# Altium PCB Simple_Foc_Power.pcbdoc
Units mil, origin at the board's own origin, x right, y up, seen from the top; angles counter-clockwise.
Board outline 2915 x 3100 mil, 2 copper layers (Top Layer, Bottom Layer); 82 components, 90 nets, 266 pads, 99 vias.
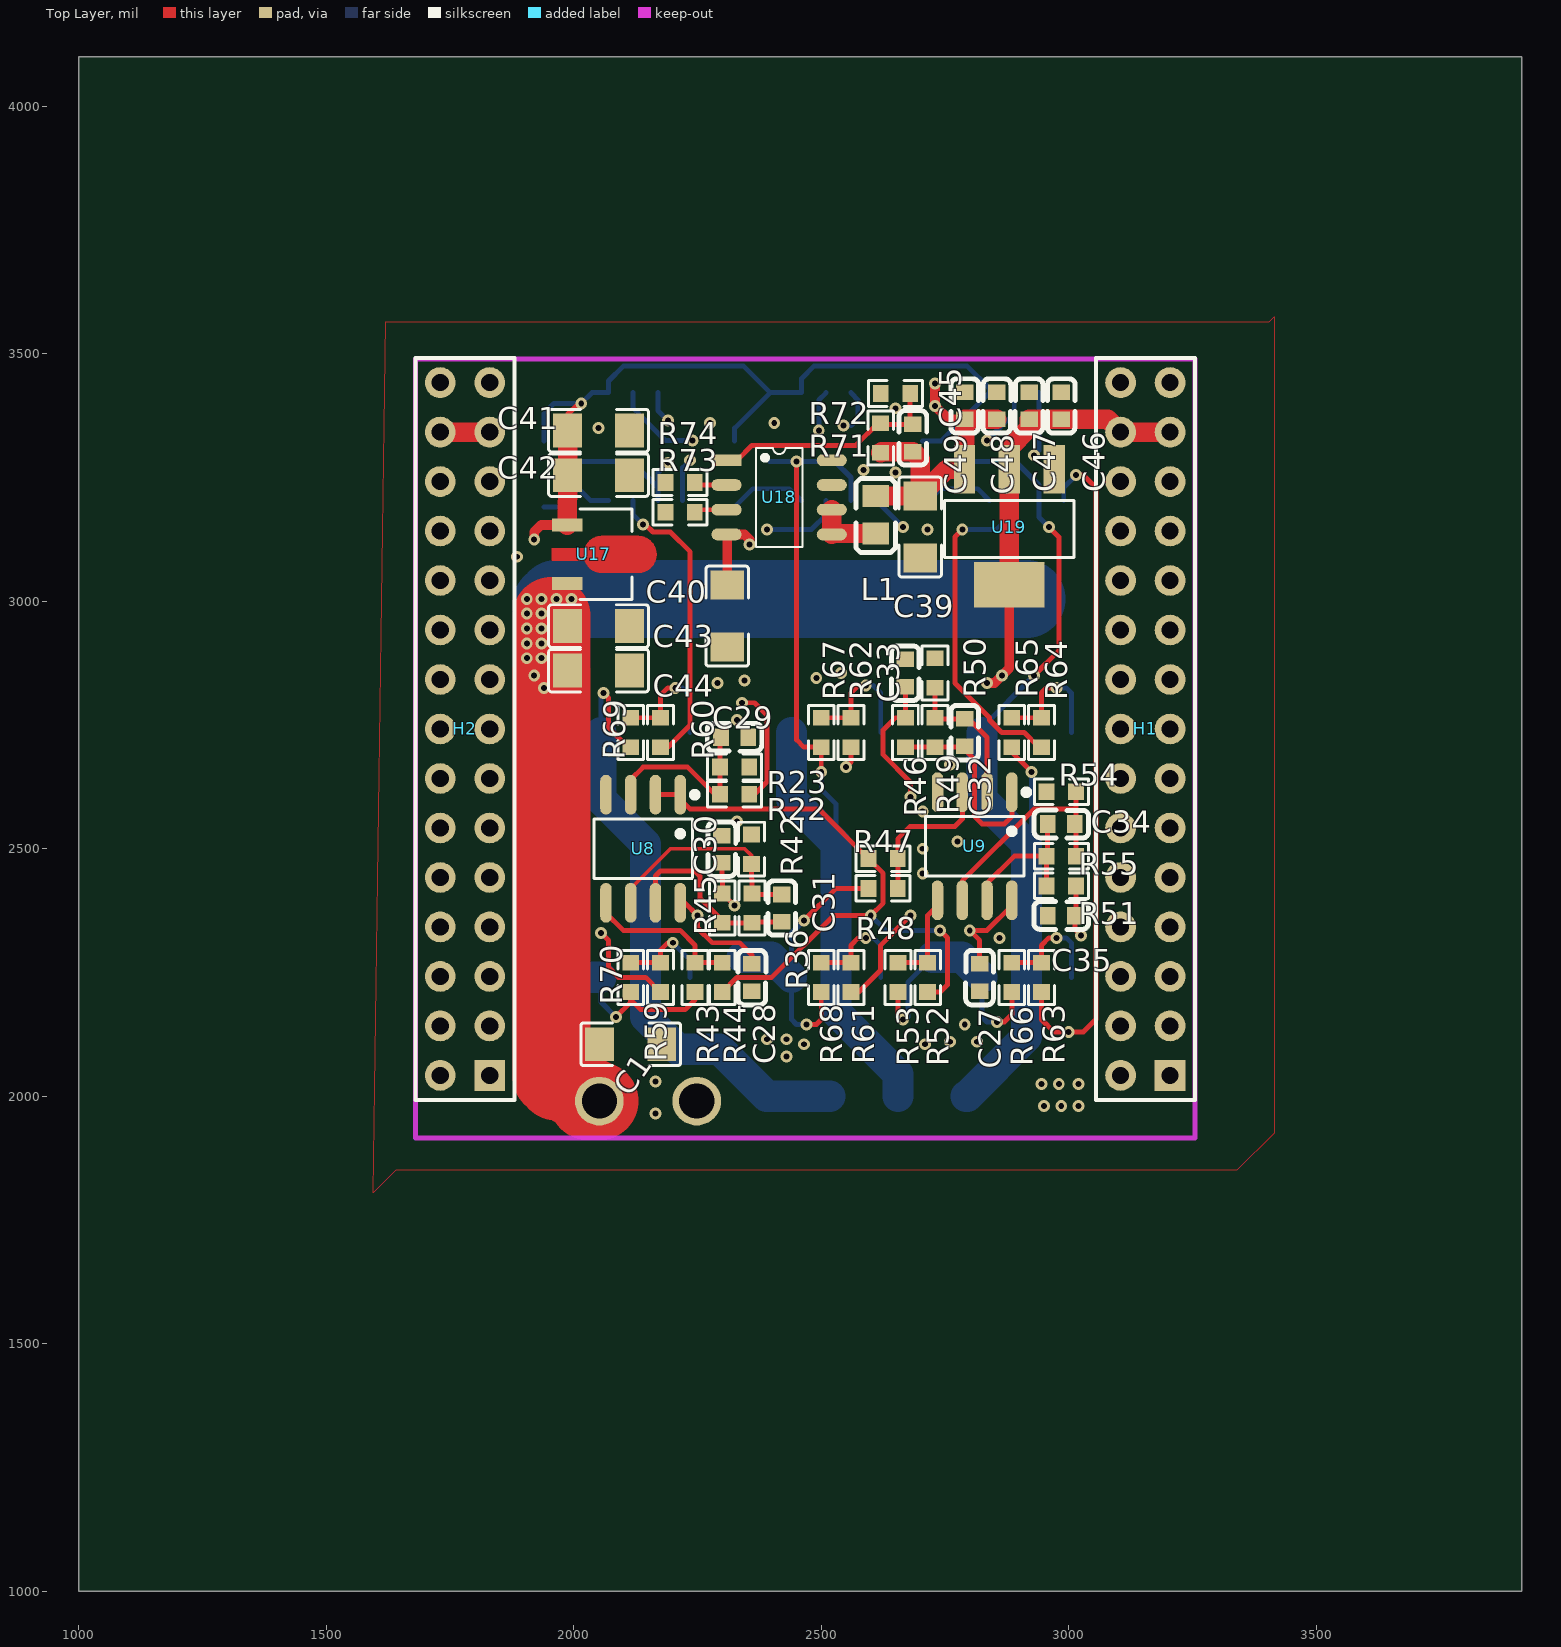
[diagram p0: Top Layer view]
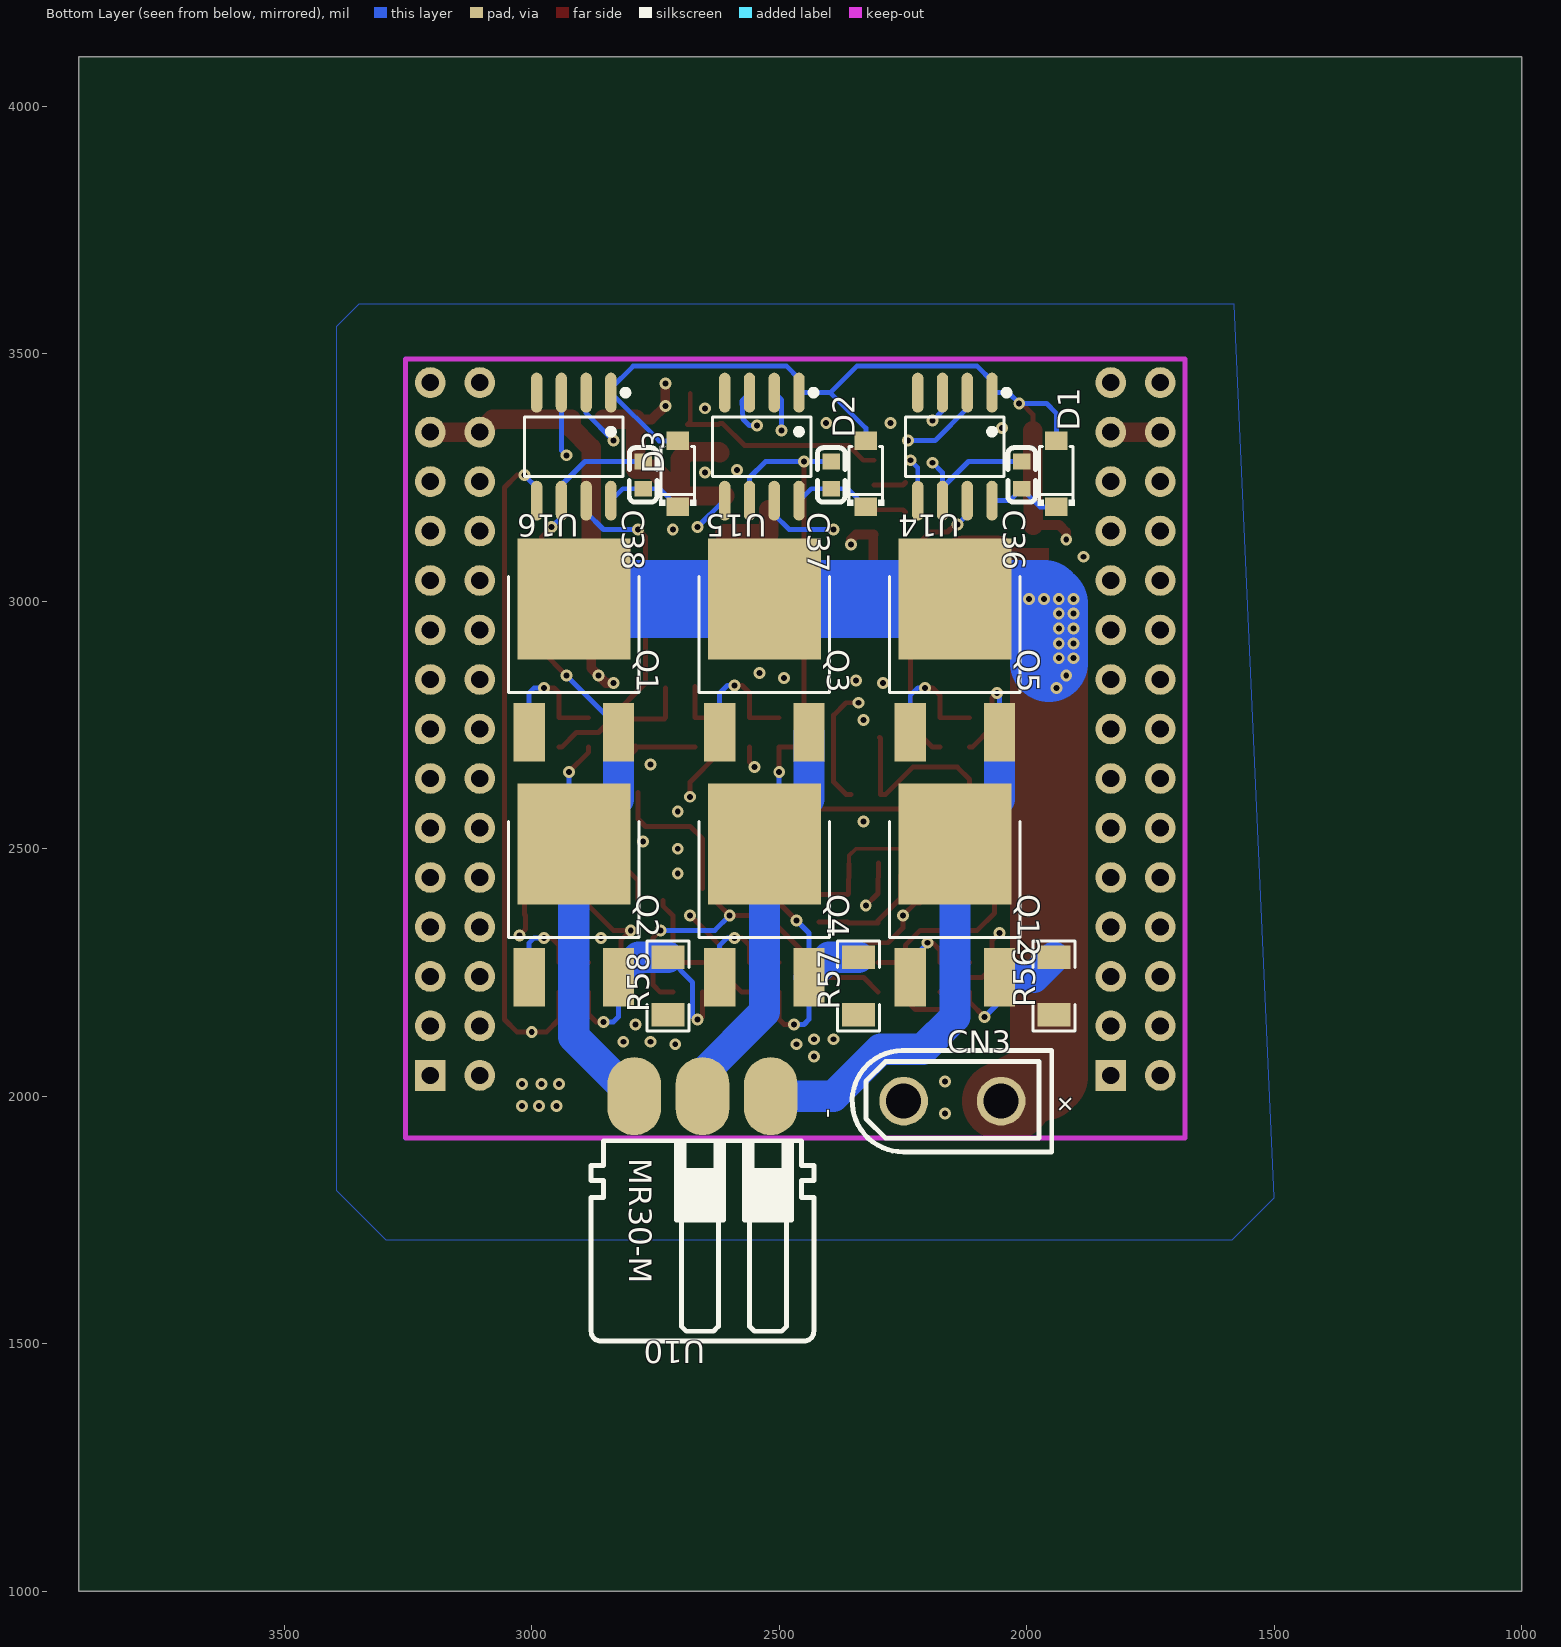
[diagram p1: Bottom Layer view, seen from below]

## Layer stack, top to bottom
Top Layer: signal copper (thickness not stored)
Dielectric: dielectric 12.6, FR-4, Dk 4.8
Bottom Layer: signal copper (thickness not stored)

## Board outline
3915,1000 1000,1000 1000,4100 3915,4100

## Components (designator, comment, footprint, x,y, rotation, side; value= is the part's Value field where it differs from the comment)
C1 "100uF" C1206 2115,2105 r0 top
C27 "100nF" C0603#1 2820,2240 r90 top
C28 "100nF" C0603#1 2360,2240 r90 top
C29 "100nF" C0603#1 2325,2725 r0 top
C30 "10nF" C0603#1 2299.03,2499.03 r270 top
C31 "100pF" C0603#1 2420,2380 r270 top
C32 "100pF" C0603#1 2790,2735 r90 top
C33 "100pF" C0603#1 2670,2855 r90 top
C34 "100pF" C0603#1 2985,2550 r180 top
C35 "10nF" C0603#1 2985,2365 r0 top
C36 "4.7u" C0603#2 2010,3255 r90 bottom
C37 "4.7u" C0603#2 2395,3255 r90 bottom
C38 "4.7u" C0603#2 2775,3255 r90 bottom
C39 "220uF" C1206 2700,3150 r90 top
C40 "100uF" C1206 2310,2970 r90 top
C41 "47uF" C1206 2050,3345 r180 top
C42 "100nF" C1206 2050,3255 r180 top
C43 "100nF" C1206 2050,2950 r0 top
C44 "100uF" C1206 2050,2860 r0 top
C45 "200p" C0603#1 2685,3330 r270 top
C46 "22u" C0603#1 2985,3395 r90 top
C47 "0.1u" C0603#1 2920,3395 r90 top
C48 "22u" C0603#1 2855,3395 r90 top
C49 "0.1u" C0603#1 2790,3395 r90 top
CN3 "XT30UPB-M" CONN-TH_XT30UPB-M 2150,1990 r0 bottom
D1 "SS14D1F" SOD-123_L2.8-W1.8-LS3.7-RD 1940,3257.5 r270 bottom
D2 "SS14D1F" SOD-123_L2.8-W1.8-LS3.7-RD 2325,3257.5 r270 bottom
D3 "SS14D1F" SOD-123_L2.8-W1.8-LS3.7-RD 2705,3257.5 r270 bottom
H1 "HDR-F-2.54_2x15" HDR-F-2.54_2X15 3154.8,2741.97 r90 top
H2 "HDR-F-2.54_2x15" HDR-F-2.54_2X15 1780,2741.97 r90 top
L1 "4.7uH" L0805 2610,3175 r90 top
Q1 "IRLR8726PBF" TO-252-2_L6.6-W6.1-P4.57-LS9.9-BR-CW 2915,2870 r90 bottom
Q2 "IRLR8726PBF" TO-252-2_L6.6-W6.1-P4.57-LS9.9-BR-CW 2915,2375 r90 bottom
Q3 "IRLR8726PBF" TO-252-2_L6.6-W6.1-P4.57-LS9.9-BR-CW 2530,2870 r90 bottom
Q4 "IRLR8726PBF" TO-252-2_L6.6-W6.1-P4.57-LS9.9-BR-CW 2530,2375 r90 bottom
Q5 "IRLR8726PBF" TO-252-2_L6.6-W6.1-P4.57-LS9.9-BR-CW 2145,2870 r90 bottom
Q12 "IRLR8726PBF" TO-252-2_L6.6-W6.1-P4.57-LS9.9-BR-CW 2145,2375 r90 bottom
R22 "15K" R0603 2325,2610 r180 top
R23 "15K" R0603 2325,2665 r0 top
R36 "15K" R0603 2360,2380 r90 top
R42 "1.5K" R0603 2359.03,2499.03 r90 top
R43 "1.5K" R0603 2245,2240 r270 top
R44 "15K" R0603 2300,2240 r270 top
R45 "30" R0603 2300,2380 r90 top
R46 "30" R0603 2670,2735 r90 top
R47 "15K" R0603 2625,2480 r0 top
R48 "1.5K" R0603 2625,2420 r0 top
R49 "15K" R0603 2730,2735 r270 top
R50 "1.5K" R0603 2730,2855 r270 top
R51 "30" R0603 2985,2425 r0 top
R52 "15K" R0603 2715,2240 r270 top
R53 "1.5K" R0603 2655,2240 r270 top
R54 "1.5K" R0603 2985,2615 r180 top
R55 "15K" R0603 2985,2485 r0 top
R56 "0.1R" R1206 1945,2222.5 r270 bottom
R57 "0.1R" R1206 2340,2222.5 r270 bottom
R58 "0.1R" R1206 2725,2222.5 r270 bottom
R59 "7.5" R0603 2175,2240 r90 top
R60 "7.5" R0603 2175,2735 r90 top
R61 "7.5" R0603 2560,2240 r90 top
R62 "7.5" R0603 2560,2735 r90 top
R63 "7.5" R0603 2945,2240 r90 top
R64 "7.5" R0603 2945,2735 r90 top
R65 "10k" R0603 2885,2735 r90 top
R66 "10k" R0603 2885,2240 r90 top
R67 "10k" R0603 2500,2735 r90 top
R68 "10k" R0603 2500,2240 r90 top
R69 "10k" R0603 2115,2735 r90 top
R70 "10k" R0603 2115,2240 r90 top
R71 "470k" R0603 2620,3330 r270 top
R72 "150k" R0603 2650,3420 r0 top
R73 "62k" R0603 2215,3180 r0 top
R74 "130k" R0603 2215,3240 r0 top
U8 "RS8552XK_C2763562" SOIC-8_L4.9-W3.9-P1.27-LS6.0-BL#1 2140,2500 r180 top
U9 "RS8552XK_C2763562" SOIC-8_L4.9-W3.9-P1.27-LS6.0-BL#1 2810,2505 r180 top
U10 "MR30-M" MR30-M 2655,2000 r180 bottom
U14 "IR2108STRPBF" SOIC-8_L4.9-W3.9-P1.27-LS6.0-BL#2 2145,3312.5 r180 bottom
U15 "IR2108STRPBF" SOIC-8_L4.9-W3.9-P1.27-LS6.0-BL#2 2535,3312.5 r180 bottom
U16 "IR2108STRPBF" SOIC-8_L4.9-W3.9-P1.27-LS6.0-BL#2 2915,3312.5 r180 bottom
U17 "L78L12ACUTR" SOT-89-3_L4.5-W2.5-P1.50-LS4.2-TL 2040,3095 r0 top
U18 "HX1314G" SOP8 2415,3210 r270 top
U19 "AMS1117-3.3" SOT-223-3_L6.5-W3.4-P2.30-LS7.0-BR 2880,3150 r90 top

## Footprints (in the part's own frame and the unit in brackets; to place one, negate y for a bottom-side part, rotate by r counter-clockwise, add the part's x,y. Pads: shape width x height; smd on the part's side, far side on the other; paste and mask are expansions set on the pad)
C0603#1 [mm]
  rect 0.8x0.9 smd: 1(-0.7,0) 2(0.7,0)
  silkscreen extent -1.41,-0.71 1.39,0.72
C0603#2 [mm]
  rect 0.8x0.9 smd: 1(0.7,0) 2(-0.7,0)
  silkscreen extent -1.39,-0.72 1.41,0.71
C1206 [mm]
  rect 1.485x1.728 smd: 1(-1.593,0) 2(1.593,0)
  silkscreen extent -2.56,-1.09 2.56,1.09
CONN-TH_XT30UPB-M [mm]
  round 2.5 hole 1.8: 1(2.5,0) 2(-2.5,0)
  silkscreen extent -5.1,-2.6 5.14,2.6
HDR-F-2.54_2X15 [mil]
  rect 62x62 hole 35: 1(-700,-50)
  round 62 hole 35: 2(-700,50) 3(-600,-50) 4(-600,50) 5(-500,-50) 6(-500,50) 7(-400,-50) 8(-400,50) 9(-300,-50) 10(-300,50) 11(-200,-50) 12(-200,50) 13(-100,-50) 14(-100,50) 15(0,-50) 16(0,50) 17(100,-50) 18(100,50) 19(200,-50) 20(200,50) 21(300,-50) 22(300,50) 23(400,-50) 24(400,50) 25(500,-50) 26(500,50) 27(600,-50) 28(600,50) 29(700,-50) 30(700,50)
  silkscreen extent -750,-100 750,100
L0805 [mil]
  rect 44.59x54.21 smd: 1(-38.05,0) 2(38.04,0)
  silkscreen extent -77,-40 73,40
MR30-M [mm]
  oval 2.75x4 smd: 1(3.5,0) 2(0,0) 3(-3.5,0)
  silkscreen extent -5.71,-12.57 5.72,-2.29
R0603 [mil]
  rect 31.75x34.02 smd: 1(-29.66,0) 2(29.66,0)
  silkscreen extent -55,-26 55,26
R1206 [mil]
  rect 47.54x66.97 smd: 1(58.22,0) 2(-58.22,0)
  silkscreen extent -91,-42 91,42
SOD-123_L2.8-W1.8-LS3.7-RD [mm]
  rect 0.95x1.15 smd: 1(1.693,0) 2(-1.693,0)
  silkscreen extent -1.41,-0.94 1.63,0.94
SOIC-8_L4.9-W3.9-P1.27-LS6.0-BL#1 [mm]
  oval 0.588x2.045 smd: 1(-1.905,-2.773) 2(-0.635,-2.773) 3(0.635,-2.773) 4(1.905,-2.773) 5(1.905,2.773) 6(0.635,2.773) 7(-0.635,2.773) 8(-1.905,2.773)
  silkscreen extent -2.8,-2.92 2.53,1.52
SOIC-8_L4.9-W3.9-P1.27-LS6.0-BL#2 [mm]
  oval 0.588x2.045 smd: 1(1.905,2.773) 2(0.635,2.773) 3(-0.635,2.773) 4(-1.905,2.773) 5(-1.905,-2.773) 6(-0.635,-2.773) 7(0.635,-2.773) 8(1.905,-2.773)
  silkscreen extent -2.53,-1.52 2.8,2.92
SOP8 [mil]
  rect 24x61 smd: 1(-75,-106.3)
  oval 24x61 smd: 2(-25,-106.3) 3(25,-106.3) 4(75,-106.3) 5(75,106.3) 6(25,106.3) 7(-25,106.3) 8(-75,106.3)
  silkscreen extent -100,-47 100,47
SOT-89-3_L4.5-W2.5-P1.50-LS4.2-TL [mm]
  rect 1.575x0.672 smd: 1(-1.356,1.5) 3(-1.356,-1.5)
  round 0 smd: 2(1.356,-0.009)
  Top Layer region: 2.283,-0.959 0.429,-0.959 0.384,-0.958 0.34,-0.954 0.296,-0.949 0.252,-0.942 0.208,-0.933 0.165,-0.921 0.123,-0.908 0.081,-0.893 0.04,-0.875 0,-0.856 -0.04,-0.835 -0.078,-0.812 -0.115,-0.787 -0.151,-0.761 -0.185,-0.733 -0.219,-0.704 -0.251,-0.672 -0.281,-0.64 -0.31,-0.606 -0.337,-0.571 -0.362,-0.534 -0.386,-0.496 -0.408,-0.458 -0.428,-0.418 -0.447,-0.339 -2.144,-0.339 -2.144,0.321 -0.447,0.321 -0.428,0.401 -0.408,0.44 -0.386,0.479 -0.362,0.517 -0.337,0.553 -0.31,0.589 -0.281,0.623 -0.251,0.655 -0.219,0.686 -0.185,0.716 -0.151,0.744 -0.115,0.77 -0.078,0.795 -0.04,0.818 0,0.839 0.04,0.858 0.081,0.875 0.123,0.891 0.165,0.904 0.208,0.915 0.252,0.925 0.296,0.932 0.34,0.937 0.384,0.94 0.429,0.941 2.283,0.941 2.328,0.94 2.372,0.937 2.416,0.932 2.46,0.925 2.504,0.915 2.547,0.904 2.589,0.891 2.631,0.875 2.672,0.858 2.712,0.839 2.752,0.818 2.79,0.795 2.827,0.77 2.863,0.744 2.898,0.716 2.931,0.686 2.963,0.655 2.993,0.623 3.022,0.589 3.049,0.553 3.075,0.517 3.098,0.479 3.12,0.44 3.14,0.401 3.159,0.36 3.175,0.319 3.189,0.277 3.202,0.234 3.212,0.19 3.22,0.147 3.227,0.103 3.231,0.058 3.233,0.014 3.233,-0.031 3.231,-0.075 3.227,-0.12 3.22,-0.164 3.212,-0.208 3.202,-0.251 3.189,-0.294 3.175,-0.336 3.159,-0.377 3.14,-0.418 3.12,-0.458 3.098,-0.496 3.075,-0.534 3.049,-0.571 3.022,-0.606 2.993,-0.64 2.963,-0.672 2.931,-0.704 2.898,-0.733 2.863,-0.761 2.827,-0.787 2.79,-0.812 2.752,-0.835 2.712,-0.856 2.672,-0.875 2.631,-0.893 2.589,-0.908 2.547,-0.921 2.504,-0.933 2.46,-0.942 2.416,-0.949 2.372,-0.954 2.328,-0.958
  silkscreen extent -0.69,-2.33 1.96,2.33
SOT-223-3_L6.5-W3.4-P2.30-LS7.0-BR [mm]
  rect 2.5x1.1 smd: 1(2.97,-2.3) 2(2.97,0) 3(2.97,2.3)
  rect 2.34x3.6 smd: 4(-2.97,0)
  silkscreen extent -1.57,-3.33 1.37,3.33
TO-252-2_L6.6-W6.1-P4.57-LS9.9-BR-CW [mm]
  rect 3x1.6 smd: 1(-3.424,2.29) 3(-3.424,-2.29)
  rect 6.2x5.8 smd: 2(3.424,0)
  silkscreen extent -1.38,-3.35 4.58,3.35

## Via types
v1: diameter 24, hole 12, Top Layer to Bottom Layer, tented both sides, 99 vias

## Nets (pads, with @x,y where several pads share a name; then routed paths per layer and width w, separated by ;. In a path a pad name is that pad's centre, name@x,y a point inside that pad or via, vN(x,y) a via of type N, cw(c..) or ccw(c..) an arc to the next point about the centre after c; other vN are vias at no path point)
+1.65V: R44.2 R47.1 R52.2 U8.1 U8.2 | length 1305.7
  Top Layer w10: U8.2 U8.1 2215,2600 2235,2580 2495.3,2580 R47.1 2625,2450.3 2625,2390 v1(2600,2365) 2525,2365 2400,2240 2329.7,2240 R44.2 ; R52.2 2740.3,2210.3 2755,2225 2755,2320 v1(2740,2335)
  Bottom Layer w10: v1(2600,2365) 2630,2335 v1(2740,2335)
+3.3V: C27.2 C28.2 C46.1 C47.1 H1.27 H1.28 R22.1 U8.8 U9.8 U19.2 U19.4 | length 3061.4
  Top Layer w10: U8.8 2224.2,2390.8 v1(2250,2365) 2250,2340 2280,2310 2335,2310 2360,2285 C28.2 ; v1(2340,2795) 2365,2795 2390,2770 2390,2635 2365,2610 R22.1 ; C27.2 2820,2315 v1(2800,2335) 2835,2335 2885,2385 U9.8
  Top Layer w19.68: v1(2835,2835) 2850,2835 v1(2865,2850) 2880,2865 U19.4
  Top Layer w39.37: U19.4 U19.2 2880,3310 2920,3350 C47.1 C46.1 3079.3,3367.4 H1.28 ; H1.28 H1.27
  Mid-Layer 2 w7.87: v1(2800,2335) 2800,2360 2865,2425.3 ; 2865,2425 v1(2865,2850)
  Mid-Layer 2 w10: v1(2250,2365) 2295,2410 2295,2775 2315,2795 v1(2340,2795) 2795,2795 v1(2835,2835)
+5V: C39.2 C45.2 C48.1 C49.1 H2.27 H2.28 L1.2 R71.2 U19.3 | length 1751.9
  Top Layer w19.68: v1(2730,3440) v1(2730,3395) 2757.6,3367.4 C49.1
  Top Layer w39.37: H2.28 H2.27 ; L1.2 C39.2 ; R71.2 2622.1,3302.4 C45.2 2700,3287.4 C39.2 ; C48.1 C49.1 U19.3 2754.2,3266.9 C39.2
  Mid-Layer 1 w19.68: H2.27 1852,3342 1975,3465 2705,3465 v1(2730,3440) 2730,3396.5 v1(2730,3395)
+12V: C40.2 C41.2 C42.2 D1.2 D2.2 D3.2 U14.1 U15.1 U16.1 U17.1 U18.4 | length 2380.7
  Top Layer w10: C41.2 1987.3,3377.3 2010,3400 v1(2015,3400)
  Top Layer w19.68: v1(1920,3125) 1920,3140 1934.1,3154.1 U17.1 ; C40.2 2310,3133.7 U18.4 2345,3135 2355,3125 v1(2355,3115)
  Top Layer w39.37: U17.1 C42.2 C41.2
  Mid-Layer 1 w19.68: v1(1920,3125) 1920,3110 1935,3095 2345,3095 2355,3105 v1(2355,3115)
  Bottom Layer w10: D1.2 1940,3380 1960,3400 v1(2015,3400) 2036.7,3421.7 U14.1 2070,3445 2100,3475 2343.3,3475 2396.7,3421.7 ; D2.2 2325,3350 2396.7,3421.7 ; D3.2 2742.5,3324.1 U16.1 2840,3430 2795,3475 2485,3475 2460,3450 U15.1 2396.7,3421.7
+POW: C1.1 C43.1 C44.1 CN3.2 Q1.2 Q3.2 Q5.2 U17.3 | length 2170.4
  Top Layer w157.48: 1955,2970 1955,2040 1965,2030 1975,2030 2045.4,1993.2 CN3.2 ; CN3.2 2028.7,1990 CN3.2
  Bottom Layer w157.48: 1955,2875 1955,2995 1964.8,3004.8 Q5.2 Q3.2 2748.1,3004.8 Q1.2
  other v1: 1940,2825 1920,2850 1905,2885 1935,2885 1905,2915 1935,2915 1905,2945 1935,2945 1905,2975 1935,2975 1905,3005 1935,3005 1965,3005 1995,3005
C29_1: C29.1 R22.2 R23.1 U8.3 | length 360.1
  Top Layer w10: U8.3 2115,2640 2140,2665 2230,2665 2285,2610 R22.2 2295.3,2722.9 C29.1
C34_1: C34.1 R54.1 R55.2 U9.6 | length 461.2
  Top Layer w10: U9.6 2785,2435 2930,2580 3009.1,2580 3014.7,2574.5 ; R55.2 R54.1
C34_2: C34.2 R51.1 R55.1 U9.7 | length 303.2
  Top Layer w10: U9.7 2835,2430 2890,2485 R55.1 ; R51.1 R55.1 ; C34.2 2957.4,2487.1 R55.1
C38_2: C38.2 D3.1 U16.8 | length 160.1
  Bottom Layer w10: D3.1 2741.6,3227.4 C38.2 2815.9,3227.4 U16.8
GND: C1.2 C27.1 C28.1 C29.2 C30.1 C33.2 C35.1 C39.1 C40.1 C41.1 C42.1 C43.2 C44.2 C46.2 C47.2 C48.2 C49.2 CN3.1 H1.1 H1.2 H1.29 H1.30 H2.1 H2.2 H2.29 H2.30 R23.2 R42.2 R50.1 R54.2 R56.1 R57.1 R58.1 R72.1 R73.1 R74.1 U8.4 U9.4 U14.4 U15.4 U16.4 U17.2 U18.7 U18.8 U19.1
  other v1: 2165,1965 2950,1980 2985,1980 3020,1980 2945,2025 2980,2025 3020,2025 2165,2030 2430,2080 2465,2105 2710,2105 2760,2110 2815,2110 2390,2115 2430,2115 2790,2145 2860,2320 2705,2450 2705,2500 2775,2515 2330,2555 2705,2575 2760,2670 2330,2760 2290,2835 2345,2840 2490,2845 2540,2855 1885,3090 2715,3145 2650,3260 2585,3265 2050,3350 2275,3360 2405,3360 2650,3390
IU: C35.2 H2.3 R51.2 | length 1412
  Top Layer w10: R51.2 3014.7,2367.1 C35.2 3012.6,2337.4 v1(3025,2325)
  Mid-Layer 1 w10: H2.3 2007,2142 2105,2240 3000,2240 3025,2265 v1(3025,2325)
IU0: Q2.3 R53.2 R58.2 R66.1 | length 526.4
  Top Layer w10: R53.2 2655,2160 v1(2665,2155) ; v1(2855,2150) 2870,2150 2885,2165 R66.1
  Bottom Layer w10: v1(2665,2155) 2675,2160 2675,2230 R58.2 ; Q2.3 2824.8,2160.2 2835,2150 v1(2855,2150)
  Bottom Layer w62.99: R58.2 2784.3,2280.7 Q2.3
IV: C33.1 H2.4 R46.2 | length 1477.9
  Top Layer w10: C33.1 R46.2 2649.7,2764.7 2625,2740 2625,2690 2680,2635 v1(2680,2605)
  Mid-Layer 1 w10: H2.4 1730,2150 1780,2200 1780,2265 1805,2290 1860,2290 2080,2510 2615,2510 2680,2575 v1(2680,2605)
IV0: Q4.3 R48.1 R57.2 R68.1 | length 607.9
  Top Layer w10: v1(2465,2355) 2530,2420 R48.1 ; v1(2470,2145) 2490,2145 2500,2155 R68.1
  Bottom Layer w10: v1(2465,2355) 2439.8,2329.8 Q4.3 2439.8,2155.2 2450,2145 v1(2470,2145)
  Bottom Layer w62.99: R57.2 2399.3,2280.7 Q4.3
IW: C30.2 H2.5 R45.2 | length 651.3
  Top Layer w10: C30.2 R45.2 2300.3,2409.7 v1(2325,2385)
  Mid-Layer 1 w10: H2.5 2022,2242 2115,2335 2275,2335 v1(2325,2385)
IW0: Q12.3 R43.2 R56.2 R70.1 | length 459.2
  Top Layer w10: v1(2085,2160) 2115,2190 R70.1 2115,2195 2135,2175 2225,2175 2245,2195 R43.2
  Bottom Layer w10: Q12.3 2054.8,2190.2 v1(2085,2160)
  Bottom Layer w62.99: R56.2 1985.5,2240.2 Q12.3
L1_1: L1.1 U18.5 U18.6 | length 139.5
  Top Layer w39.37: U18.6 U18.5 2523.3,3137 L1.1
PA0: H1.3
PA1: H1.4
PA2: H1.5
PA3: H1.6
PA4: H1.7
PA5: H1.8
PA6: H1.9
PA7: H1.10
PA11: H1.14
PA12: H1.15
PA13: H1.16
PA14: H1.17
PA15: H1.18
PB0: H1.19
PB1: H1.20
PB2: H1.21
PB3: H1.22
PB4: H1.23
PB5: H1.24
PB6: H1.25
PB7: H1.26
PB8: H2.19
PB9: H2.20
PB10: H2.21
PB11: H2.22
PB12: H2.23
PC3: H2.6
PC4: H2.7
PC5: H2.8
PC6: H2.9
PC7: H2.10
PC8: H2.11
PC9: H2.12
PC10: H2.13
PC11: H2.14
PC12: H2.15
PC13: H2.16
PC14: H2.17
PC15: H2.18
PWM1: H1.11 U16.2 | length 1200.2
  Mid-Layer 1 w10: v1(2835,3325) 3005,3325 3055,3275 3055,2615 3075,2595 3151.8,2595 H1.11
  Bottom Layer w10: v1(2835,3325) 2890,3380 U16.2
PWM1N: H2.24 U16.3 | length 1394.2
  Mid-Layer 1 w10: H2.24 1737,3142 1785,3190 2825,3190 v1(2930,3295)
  Bottom Layer w10: v1(2930,3295) 2940,3305 U16.3
PWM2: H1.12 U15.2 | length 1481.6
  Mid-Layer 2 w10: v1(2495,3345) 2525,3315 2590,3315 2640,3365 2990,3365 3055,3300 3055,2615 3104.8,2565.2 H1.12
  Bottom Layer w10: v1(2495,3345) 2495,3406.7 U15.2
PWM2N: H2.25 U15.3 | length 892.1
  Mid-Layer 1 w10: H2.25 2037,3242 2120,3325 2190,3325 2265,3400 2495,3400 2540,3355 v1(2545,3355)
  Bottom Layer w10: v1(2545,3355) 2560,3355 2573.3,3368.3 2575,3405 U15.3
PWM3: H1.13 U14.2 | length 1816
  Mid-Layer 1 w10: v1(2240,3325) 2460,3325 2490,3295 2730,3295 2795,3360 3000,3360 3065,3295 3125,3295 3155,3265 3155,2691.8 H1.13
  Bottom Layer w10: U14.2 2120,3390 2185,3325 v1(2240,3325)
PWM3N: H2.26 U14.3 | length 575.9
  Mid-Layer 1 w10: H2.26 1731.97,3241.97 1780,3290 2035,3290 2100,3355 2180,3355 v1(2190,3365)
  Bottom Layer w10: U14.3 2170,3385 v1(2190,3365)
Q1_1: Q1.1 R64.2 R65.2 | length 258.5
  Top Layer w10: R65.2 R64.2 2945,2815 2955,2825 v1(2975,2825)
  Bottom Layer w10: v1(2975,2825) 2995,2825 3005.2,2814.8 Q1.1
Q2_1: Q2.1 R63.2 R66.2 | length 235.5
  Top Layer w10: R66.2 R63.2 2945,2305 2960,2320 v1(2975,2320)
  Bottom Layer w10: v1(2975,2320) 2995,2320 3005.2,2309.8 Q2.1
Q3_1: Q3.1 R62.2 R67.2 | length 262.6
  Top Layer w10: R67.2 R62.2 2560,2815 2575,2830 v1(2590,2830)
  Bottom Layer w10: v1(2590,2830) 2605,2830 2620.2,2814.8 Q3.1
Q4_1: Q4.1 R61.2 R68.2 | length 232.6
  Top Layer w10: R68.2 R61.2 2560,2305 2575,2320 v1(2590,2320)
  Bottom Layer w10: v1(2590,2320) 2605,2320 2620.2,2304.8 Q4.1
Q5_1: Q5.1 R60.2 R69.2 | length 252.6
  Top Layer w10: R69.2 R60.2 2175,2810 2190,2825 v1(2205,2825)
  Bottom Layer w10: v1(2205,2825) 2220,2825 2235.2,2809.8 Q5.1
Q12_1: Q12.1 R59.2 R70.2 | length 200.9
  Top Layer w10: R70.2 R59.2 2175,2295 2190,2310 v1(2200,2310)
  Bottom Layer w10: v1(2200,2310) 2235.2,2274.8 Q12.1
R46_1: C32.1 R46.1 R49.2 U9.1 | length 408.2
  Top Layer w10: R46.1 R49.2 2787.9,2705.3 C32.1 2790,2700 2810,2680 2810,2565 2825,2550 2870,2550 2885,2565 U9.1
R47_2: R47.2 R48.2 U9.3 | length 421.1
  Top Layer w10: U9.3 2785,2560 2770,2545 2679.7,2545 2654.7,2520 R48.2 ; R48.2 R47.2 R48.2
R49_1: C32.2 R49.1 R50.2 U9.2 | length 292.8
  Top Layer w10: R50.2 R49.1 2732.1,2762.6 C32.2 2797.4,2762.6 2835,2725 U9.2
R52_1: R52.1 R53.1 U9.5 | length 194.4
  Top Layer w10: R53.1 R52.1 2715,2365 2735,2385 U9.5
R59_1: R59.1 U14.5 | length 1351.5
  Top Layer w10: v1(2055,2330) 2070,2315 2070,2260 2090,2240 2145.3,2240 R59.1
  Mid-Layer 2 w10: v1(2055,2330) 2095,2370 2095,3200 2150,3255 2205,3255 v1(2235,3285)
  Bottom Layer w10: U14.5 2220,3270 v1(2235,3285)
R60_1: R60.1 U14.7 | length 602.9
  Top Layer w10: v1(2140,3155) 2145,3155 2160,3140 2195,3140 2235,3100 2235,2750 2190.3,2705.3 R60.1
  Bottom Layer w10: U14.7 2120,3175 v1(2140,3155)
R61_1: R61.1 U15.5 | length 1131.4
  Top Layer w10: R61.1 2575.3,2210.3 2620,2255 2620,2305 v1(2680,2365)
  Mid-Layer 1 w10: v1(2665,3150) 2665,2710 2740,2635 2740,2425 v1(2680,2365)
  Bottom Layer w10: U15.5 2611.7,3203.3 v1(2665,3150)
R62_1: R62.1 U15.7 | length 765.2
  Top Layer w10: v1(2550,2665) 2560,2675 R62.1
  Mid-Layer 1 w10: v1(2390,3145) 2390,2810 2535,2665 v1(2550,2665)
  Bottom Layer w10: v1@2390,3150 v1(2390,3145) 2480,3145 2510,3175 U15.7
R63_1: R63.1 U16.5 | length 1373.4
  Top Layer w10: R63.1 2945,2155 2970,2130 v1(3000,2130) 3030,2130 3055,2155 3055,3230 3030,3255 v1(3015,3255)
  Bottom Layer w10: U16.5 2990,3230 v1(3015,3255)
R64_1: R64.1 U16.7 | length 690.7
  Top Layer w10: v1(2785,3145) 2770,3130 2770,2835 2840,2765 2840,2760 2865,2735 2910,2735 2939.7,2705.3 R64.1
  Bottom Layer w10: v1(2785,3145) 2855,3145 2890,3180 U16.7
S$28: 
U8_5: R43.1 R44.1 U8.5 | length 318
  Top Layer w10: U8.5 2065,2370 2100,2335 2215,2335 2245,2305 R43.1 R44.1
U8_6: C31.1 R36.2 R42.1 U8.6 | length 449.3
  Top Layer w7.87: U8.6 2115,2420 2195,2500 2345,2500 2359,2486 R42.1
  Top Layer w10: R42.1 R36.2 2362.1,2407.6 C31.1
U8_7: C31.2 R36.1 R45.1 U8.7 | length 386.7
  Top Layer w10: U8.7 2165,2445 2175,2455 2245,2455 2255,2445 2255,2400 2300,2355 R45.1 R36.1 2362.1,2352.4 C31.2
U10_1: C36.1 Q5.3 Q12.2 R69.1 U10.1 U14.6 | length 2142.6
  Top Layer w10: v1(2060,2815) 2070,2805 2070,2745 2109.7,2705.3 R69.1
  Mid-Layer 2 w10: v1(2060,2815) 2050,2825 2050,3210 2135,3295 2175,3295 v1(2190,3280)
  Bottom Layer w10: C36.1 2117.4,3282.6 2170,3230 U14.6 2170,3260 v1(2190,3280) ; Q5.3 2054.8,2809.8 v1(2060,2815)
  Bottom Layer w62.99: Q5.3 2054.8,2600 Q12.2 2145,2160 2210,2095 2295,2095 2390,2000 U10.1
U10_2: C37.1 Q3.3 Q4.2 R67.1 U10.2 U15.6 | length 1876
  Top Layer w10: v1(2450.19,3282.56) 2450.2,2720 2464.8,2705.3 R67.1 v1(2500,2655)
  Bottom Layer w10: C37.1 v1(2450.19,3282.56) 2527.4,3282.6 2560,3250 U15.6 ; v1(2500,2655) 2500,2620 2530,2590 Q4.2
  Bottom Layer w62.99: Q3.3 2439.8,2600 Q4.2 2530,2170 2655,2045 U10.2
U10_3: C38.1 Q1.3 Q2.2 R65.1 U10.3 U16.6 | length 1811.9
  Top Layer w10: R65.1 2885,2695 v1(2925,2655) ; v1(2930,2850) 2980,2900 2980,3130 v1(2960,3150)
  Bottom Layer w10: C38.1 2892.4,3282.6 2940,3235 U16.6 2940,3170 v1(2960,3150) ; Q1.3 2824.8,2744.8 v1(2930,2850) ; Q2.2 2925,2509.8 v1(2925,2655)
  Bottom Layer w62.99: U10.3 2795,2000 2915,2120 Q2.2 2824.8,2600 Q1.3
U14_8: C36.2 D1.1 U14.8 | length 155.1
  Bottom Layer w10: D1.1 1973.4,3190.9 C36.2 2034.1,3203.3 U14.8
U15_8: C37.2 D2.1 U15.8 | length 159.8
  Bottom Layer w10: D2.1 2361.6,3227.4 C37.2 2435,3227.4 U15.8
U18_1: C45.1 R71.1 R72.2 U18.1 | length 472.7
  Top Layer w10: U18.1 2330,3285 2360,3315 2570,3315 2614.7,3359.7 R71.1 2622.1,3357.6 C45.1 2679.7,3362.9 R72.2
U18_2: R74.2 U18.2 | length 66.1
  Top Layer w10: R74.2 2249.7,3235 U18.2
U18_3: R73.2 U18.3 | length 66.1
  Top Layer w10: R73.2 2249.7,3185 U18.3

## Polygon pours and split planes (outlines as drawn)
GND on Top Layer (solid): 1620,3565 3405,3565 3415,3575 3415,1925 3340,1850 1640,1850 1595,1805
GND on Bottom Layer (solid): 1580,3600 3350,3600 3395,3555 3395,1810 3295,1710 1585,1710 1500,1795

## Text inside footprints (layer, text, board x,y; h text height)
CN3: Bottom Overlay "-" at 2414.7,1975 h39.37 r90; Bottom Overlay "+" at 1926.09,1956.08 h39.37 r315